# Altium PCB PCP-Support-STM32F407-version-2layers-only-test-EMI.PcbDoc (part 3 of 3)
Units mm, origin at the board's own origin, x right, y up, seen from the top; angles counter-clockwise.
Board outline 200 x 110 mm, 2 copper layers (Top Layer, Bottom Layer), stack 1.569 mm thick; 103 components, 128 nets, 450 pads, 633 vias.
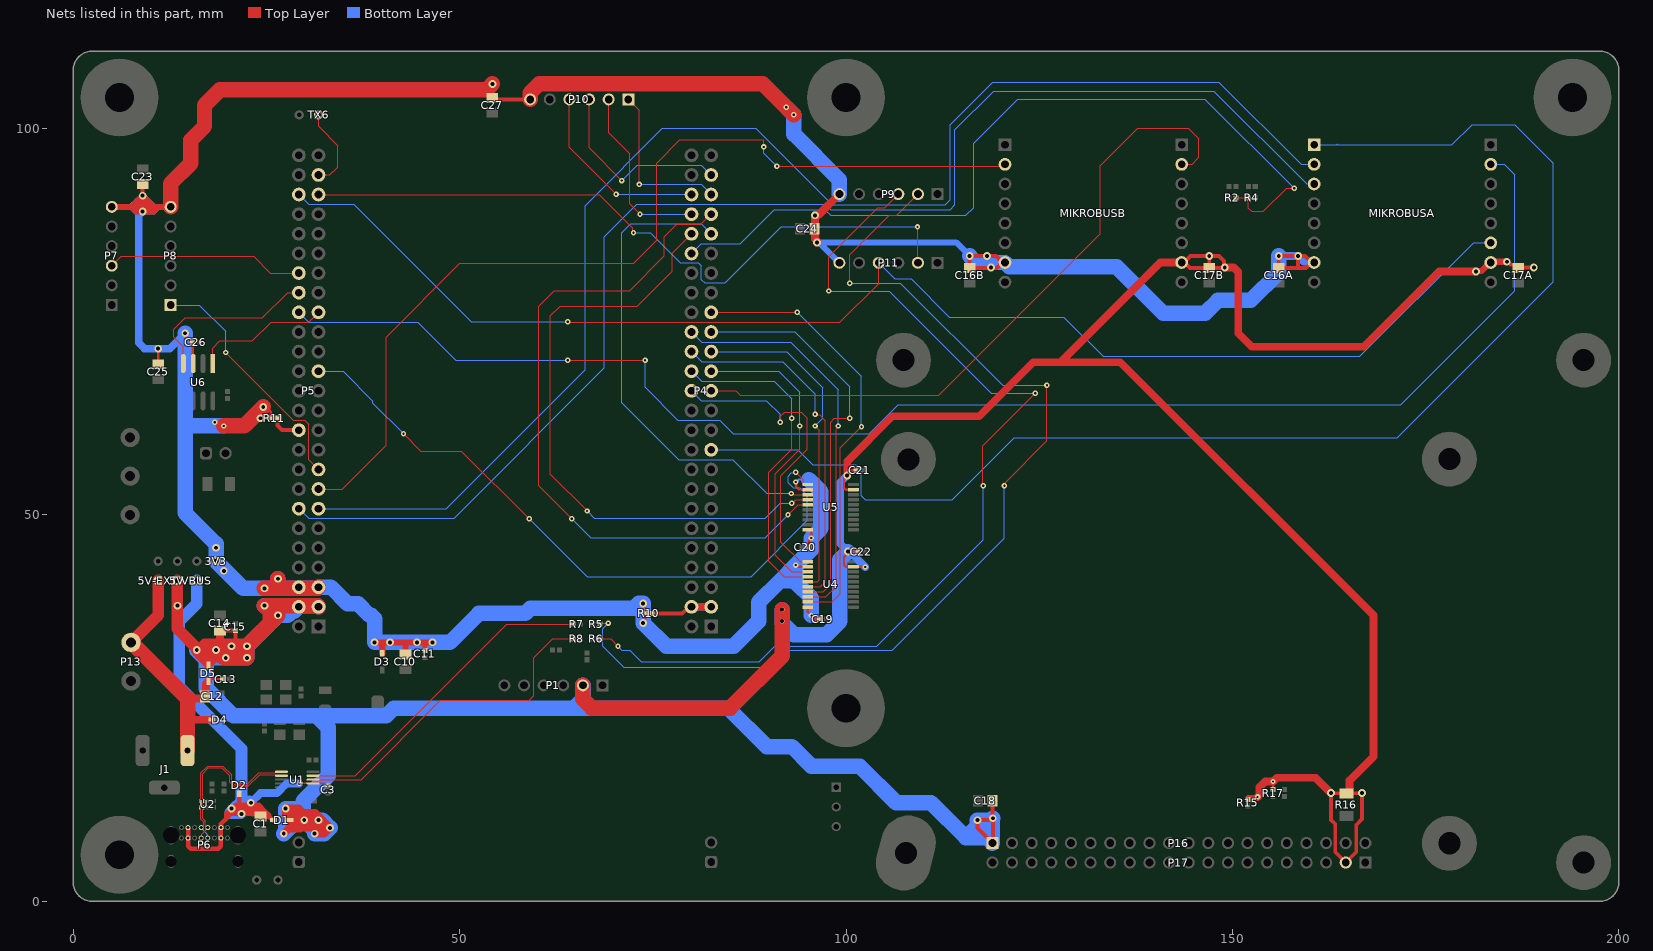
[diagram p2: the nets of this part, all layers, seen from the top]

## Via types
v1: diameter 0.7, hole 0.3, Top Layer to Bottom Layer, tented both sides, 539 vias
v2: diameter 1, hole 0.5, Top Layer to Bottom Layer, tented both sides, 92 vias
v3: diameter 0.6, hole 0.52, Top Layer to Bottom Layer, tented both sides, 2 vias

## Nets (pads, with @x,y where several pads share a name; then routed paths per layer and width w, separated by ;. In a path a pad name is that pad's centre, name@x,y a point inside that pad or via, vN(x,y) a via of type N, cw(c..) or ccw(c..) an arc to the next point about the centre after c; other vN are vias at no path point) (continued)
PC5/ADC12-IN15: MIKROBUSA.1 P4.19 | length 174.8
  Bottom Layer w0.15: P4.19@82.55,58.42 93.761,58.42 95.715,56.465 101.285,56.465 102,55.75 102,52.481 102.5,51.981 113.731,51.981 121.75,60 171.321,60 191.5,80.179 191.5,95.5 186.5,100.5 181,100.5 178.39,97.89 163.61,97.89 ; MIKROBUSA.1@160.57,97.89 163.61,97.89 ; 163.5,98 163.61,97.89
PC6/UART6-TX/TIM-3: P5.47 TX6.1 | length 11.2
  Top Layer w0.15: P5.47@31.75,93.98 33.23,93.98 34.25,95 34.25,97.75 31.75,100.25 TX6.1@31.75,102.193
PC8/D3: P5.45 P11.2 | length 91.3
  Top Layer w0.15: P5.45@31.75,91.44 68.06,91.44 72.425,87.075 72.425,86.575 v1(72.5,86.5) ; v1(109.25,87.25) 109.28,87.22 109.28,82.64 P11.2@109.31,82.61
  Bottom Layer w0.15: v1(72.5,86.5) 74.649,86.5 78.55,82.599 80.901,82.599 81.273,82.227 81.273,80.437 81.71,80 84.359,80 91.648,87.289 109.211,87.289 v1(109.25,87.25)
PC9/I2C3-SDA: MIKROBUSA.11 P5.46 P11.4 | length 176.9
  Top Layer w0.15: v1(64,75) 64.081,74.919 99.218,74.919 104.23,79.931 P11.4@104.23,82.61
  Bottom Layer w0.15: P5.46@29.21,91.44 30.468,90.182 36.318,90.182 51.5,75 v1(64,75) ; P11.4@104.23,82.61 106.305,80.535 108.421,80.535 113.381,75.575 128.188,75.575 133.263,70.5 166.5,70.5 181.19,85.19 MIKROBUSA.11@183.43,85.19
PC11/D2: P5.38 P7.3 | length 25.6
  Top Layer w0.15: P7.3@5,82.23 6.215,83.445 23.358,83.445 25.523,81.28 P5.38@29.21,81.28
PD0/CAN-RX: P5.36 U6.4 | length 23.1
  Top Layer w0.15: U6.4@14.265,69.58 14.265,71.735 13,73 13,74 14.5,75.5 24.5,75.5 27.74,78.74 P5.36@29.21,78.74
PD1/CAN-TX: P5.33 U6.1 | length 17.6
  Top Layer w0.15: U6.1@18.075,69.58 18.075,71.575 19,72.5 23.208,72.5 25.615,74.906 30.456,74.906 P5.33@31.75,76.2
PD2/INT: MIKROBUSA.15 P5.34 | length 192.1
  Top Layer w0.15: v1(64,70) v1(74,70)
  Bottom Layer w0.15: P5.34@29.21,76.2 30.515,74.895 44.605,74.895 49.5,70 v1(64,70) ; v1(74,70) 74,66.5 78.24,62.26 83.666,62.26 85.426,60.5 102.997,60.5 106.747,64.25 171.75,64.25 186.5,79 186.5,94 185.15,95.35 MIKROBUSA.15@183.43,95.35
PD7/A0: P5.27 U5.1 | length 88.3
  Top Layer w0.15: v1(42.75,60.5) 45,58.25 50.25,58.25 v1(59,49.5) ; v1(93.5,55.5) 94.474,54.526 94.474,54.075 94.624,53.925 U5.1@95.05,53.925
  Bottom Layer w0.15: P5.27@31.75,68.58 34.92,68.58 38.782,64.718 38.782,64.468 v1(42.75,60.5) ; v1(59,49.5) 66.494,42.006 87.732,42.006 95,49.273 95,52.5 94,53.5 93.151,53.5 92.5,54.151 92.5,55 92.925,55.425 93.425,55.425 v1(93.5,55.5)
PD8/UART3-TX: P4.40 R2.2 R4.2 | length 106.9
  Top Layer w0.15: R2.2@150.45,91 R4.2@152.05,91 ; R4.2@152.1,91 R4.2@152.05,91 ; v1(158,92.25) 157,92.25 154,89.25 152.5,89.25 152.05,89.7 R4.2@152.05,91
  Bottom Layer w0.15: P4.40@80.01,83.82 81.286,85.096 86.346,85.096 87.75,86.5 90.746,89.496 97.254,89.496 98,88.75 115.5,88.75 116.5,89.75 116.5,98.053 122.25,103.803 146.447,103.803 v1(158,92.25)
PD9/A1: P4.41 U5.3 | length 63.5
  Top Layer w0.15: v1(92.905,52.767) 93.054,52.767 93.196,52.625 U5.3@95.05,52.625
  Bottom Layer w0.15: P4.41@82.55,86.36 81.277,87.633 72.133,87.633 71,86.5 71,64.5 78.346,57.154 85.346,57.154 89.733,52.767 v1(92.905,52.767)
PD10/A2: P4.42 U5.4 | length 81.2
  Top Layer w0.15: v1(66.5,50.5) 61.75,55.25 61.75,75.75 63,77 73,77 77.5,81.5 77.5,83.85 P4.42@80.01,86.36 ; v1(93,51.5) 93.475,51.975 U5.4@95.05,51.975
  Bottom Layer w0.15: v1(66.5,50.5) 67.455,49.545 89.545,49.545 91.5,51.5 v1(93,51.5)
PD11/A3: P4.43 U5.5 | length 91.3
  Top Layer w0.15: v1(64.5,49.5) 60.25,53.75 60.25,77 62.25,79 72,79 76.5,83.5 76.5,86 78.076,87.576 81.226,87.576 P4.43@82.55,88.9 ; v1(92.5,50) 93.825,51.325 U5.5@95.05,51.325
  Bottom Layer w0.15: v1(64.5,49.5) 66.969,47.031 89.531,47.031 v1(92.5,50)
PD12: P4.44 P10.2 | length 23.2
  Top Layer w0.15: P10.2@69.29,103.75 69.29,99.46 72,96.75 72,90.25 v1(73.35,88.9)
  Bottom Layer w0.15: v1(73.35,88.9) P4.44@80.01,88.9
PD13: P4.45 P10.1 | length 21.4
  Top Layer w0.15: P10.1@71.83,103.75 73.25,102.33 v1(73.25,92.75)
  Bottom Layer w0.15: v1(73.25,92.75) 81.24,92.75 P4.45@82.55,91.44
PD14: P4.46 P10.4 | length 24.5
  Top Layer w0.15: P10.4@64.21,103.75 64.21,97.54 v1(70.25,91.5)
  Bottom Layer w0.15: v1(70.25,91.5) 70.28,91.47 79.98,91.47 P4.46@80.01,91.44
PD15: P4.47 P10.3 | length 25.2
  Top Layer w0.15: P10.3@66.75,103.75 66.75,97.5 v1(71,93.25)
  Bottom Layer w0.15: v1(71,93.25) 73,95.25 81.28,95.25 P4.47@82.55,93.98
PE0/CS_B: P5.17 P8.1 | length 32.3
  Top Layer w0.15: v1(19.75,71) 28.5,62.25 30,62.25 30.5,61.75 30.5,59.144 30.5,57.13 P5.17@31.75,55.88
  Bottom Layer w0.15: P8.1@12.62,77.15 16.35,77.15 19.75,73.75 v1(19.75,71)
PE2/RST: MIKROBUSB.2 P5.15 | length 124
  Top Layer w0.15: P5.15@31.75,53.34 34.84,53.34 40.5,59 40.5,73 50.055,82.555 72.555,82.555 75.5,85.5 75.5,95.5 78.5,98.5 89.275,98.5 89.362,98.412 v1(89.362,97.605) ; v1(91.065,95.113) 120.333,95.113 MIKROBUSB.2@120.57,95.35
  Bottom Layer w0.15: v1(89.362,97.605) 89.362,96.816 v1(91.065,95.113)
PE4/RST: MIKROBUSA.2 P5.13 | length 182.5
  Bottom Layer w0.15: P5.13@31.75,50.8 48.3,50.8 66.25,68.75 66.25,90 76.25,100 88.318,100 98.226,90.092 112.823,90.092 113.5,90.769 113.5,100.5 119,106 148.221,106 158.871,95.35 MIKROBUSA.2@160.57,95.35
PE5/CS: MIKROBUSA.3 P5.14 | length 176
  Bottom Layer w0.15: P5.14@29.21,50.8 30.465,49.545 49.295,49.545 68.75,69 68.75,86 72.92,90.17 97.328,90.17 97.998,89.5 113.5,89.5 114.09,90.09 114.09,99.806 119.103,104.819 147.586,104.819 159.595,92.81 MIKROBUSA.3@160.57,92.81
PE7/INT: MIKROBUSB.15 P4.25 | length 88.3
  Top Layer w0.15: P4.25@82.55,66.04 85.765,66.04 86.305,65.5 112,65.5 132.894,86.394 132.894,95.144 137.75,100 144.271,100 145.639,98.632 145.639,96.249 144.783,95.393 143.473,95.393 MIKROBUSB.15@143.43,95.35
  Bottom Layer w0.15: P4.25@82.55,66.04 P4.25@82.59,66
PE8/D0: P4.26 U4.1 | length 40.5
  Top Layer w0.15: v1(91.5,62) 91.5,62.743 92.05,63.293 94.207,63.293 95,62.5 95,58.5 91.587,55.087 91.587,46.461 94.123,43.925 U4.1@95.05,43.925
  Bottom Layer w0.15: P4.26@80.01,66.04 81.263,64.787 89.713,64.787 91.5,63 v1(91.5,62)
PE9/D1: P4.27 U4.3 | length 40.1
  Top Layer w0.15: v1(94,61.5) 94,58.5 90.835,55.335 90.835,44.766 92.975,42.625 U4.3@95.05,42.625
  Bottom Layer w0.15: P4.27@82.55,68.58 91.285,68.58 94,65.865 v1(94,61.5)
PE10/D2: P4.28 U4.4 | length 42.6
  Top Layer w0.15: v1(93,62.5) 93,58.5 90,55.5 90,44 92,42 95.025,42 U4.4@95.05,41.975
  Bottom Layer w0.15: P4.28@80.01,68.58 81.332,67.258 90.737,67.258 93,64.994 v1(93,62.5)
PE11/D3: P4.29 U4.5 | length 43.5
  Top Layer w0.15: U4.5@95.05,41.325 96.325,41.325 96.57,41.57 96.57,60.93 v1(96,61.5)
  Bottom Layer w0.15: P4.29@82.55,71.12 92.337,71.12 97,66.457 97,62.5 v1(96,61.5)
PE12/D4: P4.30 U4.6 | length 45.9
  Top Layer w0.15: U4.6@95.05,40.675 96.675,40.675 97.303,41.303 97.303,62.197 96.575,62.925 96.075,62.925 v1(96,63)
  Bottom Layer w0.15: P4.30@80.01,71.12 81.309,69.821 91.799,69.821 96,65.62 v1(96,63)
PE13/D5: P4.31 U4.7 | length 52
  Top Layer w0.15: U4.7@95.05,40.025 97.025,40.025 98,41 98,62 98.5,62.5 v1(100.5,62.5)
  Bottom Layer w0.15: P4.31@82.55,73.66 93.389,73.66 100.5,66.549 v1(100.5,62.5)
PE14/D6: P4.32 U4.8 | length 51.9
  Top Layer w0.15: U4.8@95.05,39.375 97.375,39.375 98.723,40.723 98.723,61.137 99,61.414 v1(99,61.5)
  Bottom Layer w0.15: P4.32@80.01,73.66 81.335,72.335 92.84,72.335 99,66.175 v1(99,61.5)
PE15/D7: P4.33 U4.9 | length 56.8
  Top Layer w0.15: P4.33@82.55,76.2 v1(93.7,76.2) ; U4.9@95.05,38.725 98.201,38.725 99.27,39.794 99.27,58.682 v1(102,61.412)
  Bottom Layer w0.15: v1(93.7,76.2) 102,67.9 v1(102,61.412)
PMOD-RX: P9.3 R6.1 | length 128.2
  Top Layer w0.15: R6.1@68.16,33.96 69.54,33.96 v1(70.5,33) ; v1(97.75,78.96) 97.75,83.418 104.082,89.75 105.02,89.75 P9.3@106.77,91.5 ; v1(117.75,53.75) 117.698,53.802 117.698,58.948 v1(124.5,65.75)
  Bottom Layer w0.15: v1(70.5,33) 71,32.5 72,32.5 73.5,31 88.75,31 90.75,33 104,33 117.75,46.75 v1(117.75,53.75) ; v1(97.75,78.96) 105.603,78.96 118.813,65.75 v1(124.5,65.75)
PMOD-TX: P9.2 R5.1 | length 133.3
  Top Layer w0.15: R5.1@68.16,35.865 68.295,36 v1(69.25,36) ; v1(100.5,79.96) 100.5,83.679 105.571,88.75 106.56,88.75 P9.2@109.31,91.5 ; v1(120.5,53.75) 120.592,53.842 120.592,54.171 126,59.58 v1(126,66.75)
  Bottom Layer w0.15: v1(69.25,36) 68.5,35.25 68.5,33 71.25,30.25 90.5,30.25 92.75,32.5 106,32.5 120.5,47 v1(120.5,53.75) ; v1(100.5,79.96) 107.04,79.96 120.25,66.75 v1(126,66.75)
USB-UART-RX: R7.1 U1.9 | length 41.8
  Top Layer w0.15: U1.9@31.05,16.25 36.493,16.25 56.108,35.865 R7.1@64.72,35.865
USB-UART-TX: R8.1 U1.8 | length 44.1
  Top Layer w0.15: U1.8@31.05,15.75 37.25,15.75 47.5,26 59,26 59.598,26.598 59.598,31.485 62.073,33.96 R8.1@64.72,33.96
USB_D_N: P6.A7 P6.B7 U1.2 U2.2 U2.9 | length 21.8
  Top Layer w0.125: P6.B7@16.575,8.175 16.675,8.275 16.675,8.675 17.425,9.425 P6.A7@17.425,9.525 17.425,9.546 17.125,9.846 17.125,10.375 16.979,10.521 16.78,10.72 16.78,11.854 16.853,11.928 16.868,11.928 16.905,11.965 U2.2@16.905,12.148 16.905,12.33 16.868,12.368 16.853,12.368 16.78,12.441 16.78,12.689 16.853,12.763 16.868,12.763 16.905,12.8 U2.9@16.905,12.983 16.905,13.165 16.868,13.203 16.853,13.203 16.78,13.276 16.78,16.53 17.5,17.25 19.25,17.25 20.244,16.256 20.244,15.402 20.777,14.869 22.619,14.869 24.124,16.374 26.089,16.374 26.212,16.25 U1.2@26.95,16.25
USB_D_P: P6.A6 P6.B6 U1.1 U2.1 U2.10 | length 22.3
  Top Layer w0.125: P6.A6@16.575,9.525 16.575,9.546 16.875,9.846 16.875,10.271 16.53,10.616 16.53,11.854 16.457,11.928 16.442,11.928 16.405,11.965 U2.1@16.405,12.148 16.405,12.33 16.442,12.368 16.457,12.368 16.53,12.441 16.53,12.689 16.457,12.763 16.442,12.763 16.405,12.8 U2.10@16.405,12.983 16.405,13.165 16.442,13.203 16.457,13.203 16.53,13.276 16.53,16.634 17.396,17.5 19.354,17.5 20.494,16.359 20.494,15.506 20.881,15.119 22.516,15.119 23.947,16.55 24.02,16.624 26.089,16.624 26.216,16.75 U1.1@26.95,16.75
  Bottom Layer w0.125: P6.A6@16.575,9.525 16.575,9.425 17.325,8.675 17.325,8.275 P6.B6@17.425,8.175
V5V_EXT: 5V-EXT.1 C12.2 C13.2 D4.2 D5.2 J1.1 P13.2 | length 36.1
  Top Layer w0.3: D5.2@17.5,28.43 17.5,28.59 17.66,28.75 C13.2@19.3,28.75
  Top Layer w1: 14.8,23.5 D4.2@17.93,23.5 ; 14.849,26.25 16.9,26.25 17.05,26.4 C12.2@17.05,26.5 17.2,26.65 17.2,28.13 D5.2@17.5,28.43
  Top Layer w1.5: P13.2@7.5,33.5 11,37 5V-EXT.1@11,41.5
  Top Layer w2: P13.2@7.596,33.404 14.849,26.151 ; J1.1@14.8,19.5 14.8,23.5 ; 14.849,23.5 14.849,26.25
VBUS: C1.2 C3.2 D1.2 D2.2 P6.A4 P6.A9 P6.B4 P6.B9 U1.7 VBUS.1 | length 103.3
  Top Layer w0.2: v1(29.25,15.25) U1.7@31.05,15.25 32.65,15.25 C3.2@33,14.9
  Top Layer w0.6: P6.A4@14.875,9.525 P6.B9@14.875,8.175 14.885,8.165 14.885,7.139 15.236,6.788 18.774,6.788 19.125,7.139 P6.B4@19.125,8.175 P6.A9@19.125,9.525 19.135,9.535 19.135,10.019 19.817,10.702 ; v2@20.577,11.923 v2@20.683,11.923 ; 21.468,12.077 22.5,12.077 ; D2.2@21.5,13.93 21.5,12.5 ; D1.2@25.93,10.5 25.83,10.5 25.376,10.954 ; 19.817,10.702 20.433,11.317 ; 19.817,10.702 19.817,11.317 ; 19.817,11.317 20.433,11.317 ; 19.817,11.317 v2(20.5,12) v2@20.606,12 ; 20.433,11.317 v2@21.289,11.317 ; v2@20.606,12 20.608,12 21.108,12.5 21.5,12.5 ; v2@20.606,12 v2@20.683,11.923 ; v2@20.683,11.923 v2@21.289,11.317 ; v2@20.683,11.923 21.468,11.923 v2@21.93,11.462 ; v2@21.289,11.317 v2(21.786,11.317) ; 21.5,12.5 23.55,12.5 ; v2(21.786,11.317) 23.186,11.317 23.203,11.3 23.9,11.3 C1.2@24.25,10.95 24.254,10.954 25.376,10.954 ; v2(21.786,11.317) v2@21.93,11.462 ; v2@21.93,11.462 22.215,11.747 ; 22.215,11.747 24.753,11.747 ; 22.215,11.747 22.5,12.032 22.5,12.077 ; 22.5,12.077 23.7,12.077 ; 23.55,12.5 24.05,12.5 24.05,12.427 ; 23.55,12.5 23.55,12.227 23.7,12.077 ; 23.7,12.077 24.05,12.427 ; 24.05,12.427 24.073,12.427 24.753,11.747 ; 24.753,11.747 25.376,11.124 25.376,10.954
  Bottom Layer w0.6: P6.B4@19.125,8.175 P6.A9@19.125,9.525 P6.A9@19.135,9.535 ; 20.317,11.317 v2(21.786,11.317) ; 20.327,11.423 20,11.75 20.142,11.75 20.392,12 v2(20.5,12) ; 20.423,11.423 20.423,11.588 20.423,11.923 v2(20.5,12) ; 21.786,12.95 21.46,12.95 v2@20.544,12.034 ; v2(23,12.75) 22.502,12.75 21.786,12.034 ; v2(20.5,12) 20.534,12.034 v2@20.544,12.034 ; v2(20.5,12) v2@20.51,12 ; v2(20.5,12) v2@20.608,12 ; v2@20.51,12 v2@20.608,12 ; v2@20.51,12 v2@20.544,12.034 ; v2@20.544,12.034 20.869,12.034 21.786,12.034 ; v2@20.608,12 20.722,11.886 21.185,11.423 21.214,11.394 21.709,11.394 v2@21.75,11.353 ; v2@20.608,12 20.836,12 21.434,12 ; 21.434,12 21.75,11.684 21.75,11.5 v2@21.75,11.461 ; 21.434,12 21.434,11.777 21.731,11.481 v2@21.75,11.461 ; v2@21.75,11.353 v2@21.75,11.461 ; v2@21.75,11.353 v2(21.786,11.317) ; v2@21.75,11.461 v2@21.786,11.426 ; v2(21.786,11.317) v2@21.786,11.426 ; v2(21.786,11.317) 22.502,12.034 22.284,12.034 21.786,12.034 ; v2@21.786,11.426 21.786,11.536 21.786,12.034
  Bottom Layer w1: v2(23,12.75) 24.25,14 26.376,14 27.626,15.25 v1(29.25,15.25)
  Bottom Layer w1.5: VBUS.1@16,41.5 16,38.5 13.737,36.237 13.737,27.763 21.786,19.714 21.786,12.95 ; 21.786,12.034 21.786,12.95 ; 21.786,12.95 20.869,12.034 20.836,12 20.722,11.886 20.423,11.588 20.327,11.491 20.327,11.423 20.423,11.423 21.185,11.423 21.673,11.423 21.731,11.481 21.75,11.5 21.786,11.536 22.284,12.034 v2(23,12.75) 22.8,12.95 21.786,12.95
VCC_3V3: 3V3.1 C10.2 C11.2 C16A.2 C16B.2 C19.2 C20.2 C23.2 C24.2 C25.2 C26.2 C27.2 D3.1 MIKROBUSA.7 MIKROBUSB.7 P5.5 P5.6 P7.6 P8.6 P9.6 P10.6 P11.6 R10.1 R11.1 U4.2 U4.10 U5.2 U5.10 U6.3 | length 489.7
  Top Layer w0.3: C25.2@11,69.45 v2(11,71.5) ; v2(14.5,73.5) 14.5,73.25 C26.2@15.44,72.31 15.487,72.263 15.487,69.627 U6.3@15.535,69.58 ; v2(24.25,62.5) 25.449,62.5 25.574,62.625 25.574,63.379 25.362,63.591 25.159,63.591 24.79,63.961 v2(24.6,63.961) ; v2(73.75,36) 73.75,36.189 74.05,36.489 R10.1@74.05,37.25 ; v2(73.751,38.544) 73.751,38.355 74.051,38.055 R10.1@74.051,37.294 ; v1(93.5,43.5) 93.725,43.275 U4.2@95.05,43.275 ; v1(93.5,54.25) 93.577,54.173 93.577,53.598 93.9,53.275 U5.2@95.05,53.275 ; U4.10@95.05,38.075 95.05,37.45 v1(95.525,36.975) 96,36.5 C19.2@96.55,36.5 ; U5.10@95.05,48.075 95.425,48.075 95.5,48 v1(95.5,47) 95.5,46.892 95.177,46.569 C20.2@95.177,45.79
  Top Layer w0.5: v2(9,91.3) C23.2@9,92.8 ; v2(54.25,105.75) C27.2@54.25,103.95 C27.2@54.45,103.75 ; C27.2@54.35,103.75 C27.2@54.45,103.75 ; P10.6@59.13,103.75 C27.2@54.45,103.75 ; MIKROBUSB.7@120.57,82.65 MIKROBUSB.7@120.259,82.65 ; MIKROBUSA.7@160.57,82.65 MIKROBUSA.7@160.259,82.65 ; MIKROBUSB.7@120.259,82.65 119.409,83.5 v2(118.25,83.5) v2(116,83.5) C16B.2@116,81.95 119.504,81.95 120.204,82.65 MIKROBUSB.7@120.259,82.65 ; 158.5,81.95 v2(158.5,83.5) ; 158.5,81.95 C16A.2@156,81.95 v2(156,83.5) v2(158.5,83.5) ; 158.5,81.95 159.504,81.95 160.204,82.65 MIKROBUSA.7@160.259,82.65 ; v2(158.5,83.5) 159.409,83.5 MIKROBUSA.7@160.259,82.65
  Top Layer w0.6: C11.2@45.5,32.45 45.5,33.5
  Top Layer w0.8: P7.6@5,89.85 7.55,89.85 ; P8.6@12.62,89.85 11,89.85 ; v2(39,33.5) 40,33.5 ; D3.1@40,32.07 40,33.5 ; C10.2@43,31.95 43,33.5 ; v2(46.5,33.5) 45.5,33.5 v2(44.5,33.5) 43,33.5 ; 7.55,89.85 7.912,90.213 ; 7.55,89.85 8.112,89.288 v2@8.908,89.288 ; 7.912,90.213 8.275,90.575 ; 7.912,90.213 7.983,90.213 ; 7.983,90.213 9,90.213 ; 7.983,90.213 v2@8.908,89.288 ; 8.275,90.575 9,90.575 ; 8.275,90.575 v2(9,91.3) ; v2@8.908,89.288 8.946,89.25 v2(9,89.25) ; v2@8.908,89.288 8.962,89.288 v2(9,89.25) ; v2(9,89.25) v2@9.025,89.275 ; v2(9,89.25) 9,90.213 ; 9,90.213 9.237,90.213 9.6,89.85 ; 9,90.213 9,90.575 ; 9,90.575 9.575,90.575 9.65,90.65 ; 9,90.575 v2(9,91.3) ; v2(9,91.3) 9.65,90.65 ; v2@9.025,89.275 9.6,89.85 ; v2@9.025,89.275 10.425,89.275 11,89.85 ; 9.6,89.85 10.45,89.85 ; 9.65,90.65 10.45,89.85 ; 10.45,89.85 11,89.85 ; 40,33.5 v2(41,33.5) 43,33.5
  Top Layer w1: v2(96.25,85.25) 96.25,85.439 96,85.689 96,86.95 C24.2@95.95,87 96,87.05 v2(96,88.75) 96.038,88.788 96.438,88.788 P9.6@99.15,91.5
  Top Layer w2: P8.6@12.62,89.85 12.62,92.86 15.25,95.49 15.25,98.5 17,100.25 17,103 19,105 53.5,105 v2(54.25,105.75) ; v1(19.5,61.5) 22.14,61.5 v2(24.6,63.961) ; v2(24.75,40.49) 26.5,40.49 ; v2(26.5,41.74) 26.5,40.49 ; P5.5@31.75,40.64 31.6,40.49 26.5,40.49 ; P10.6@59.13,103.75 59.13,104.578 60.302,105.75 89.25,105.75 v1(93.25,101.75)
  Bottom Layer w0.3: v1(93.5,54.25) 93.557,54.25 93.876,54.568 95.182,54.568
  Bottom Layer w0.8: P7.6@5,89.85 7.55,89.85 ; P8.6@12.62,89.85 11,89.85 ; 3V3.1@18.5,44 18.5,43.892 19.462,42.93 19.462,42.788 v2(19.5,42.75) ; P11.6@99.15,82.61 96.548,85.212 96.288,85.212 v2(96.25,85.25) 114.25,85.25 v2(116,83.5) ; 7.55,89.85 8.275,90.575 ; 7.55,89.85 9,89.85 ; 7.55,89.85 8.112,89.288 8.962,89.288 v2(9,89.25) ; 8.275,90.575 9,90.575 ; 8.275,90.575 v2(9,91.3) ; v2(9,89.25) 9.038,89.288 10.438,89.288 11,89.85 ; v2(9,89.25) 9,89.85 ; 9,89.85 10.45,89.85 ; 9,89.85 9,90.575 ; 9,90.575 9.325,90.575 9.525,90.775 ; 9,90.575 v2(9,91.3) ; v2(9,91.3) 9.525,90.775 ; 9.525,90.775 10.45,89.85 ; 10.45,89.85 11,89.85
  Bottom Layer w1: v2(9,89.25) 8.5,88.75 8.5,72.25 9.25,71.5 v2(11,71.5) 12.5,71.5 v2(14.5,73.5) ; v2(156,83.5) v2(158.5,83.5) 159.225,82.775 160.445,82.775 MIKROBUSA.7@160.57,82.65
  Bottom Layer w2: v2(14.5,73.5) 14.5,61.875 ; v1(19.5,61.5) 14.875,61.5 14.5,61.875 ; v2(26.5,41.74) 26.5,40.74 26.75,40.49 ; 92.5,102.5 v1(93.25,101.75) 93.25,99.25 99.15,93.35 P9.6@99.15,91.5 ; 95.182,54.568 96.75,53 96.75,48.25 v1(95.5,47) 95.5,45.5 v1(93.5,43.5) ; v1(95.525,36.975) 95.525,39.225 93.5,41.25 ; v2(116,83.5) 116.85,82.65 MIKROBUSB.7@120.57,82.65 121.134,82.086 135.036,82.086 141.021,76.1 146.479,76.1 148.118,77.739 152.361,77.739 156,81.379 v2(156,83.5) ; 14.5,61.875 14.5,50.25 18.5,46.25 v2(18.5,45.75) 3V3.1@18.5,44 22.01,40.49 v2(24.75,40.49) 26.75,40.49 ; 26.75,40.49 31.6,40.49 P5.5@31.75,40.64 33.36,40.64 35.5,38.5 36.875,38.5 38.375,37 38.578,37 39,36.578 v2(39,33.5) v2(41,33.5) v2(44.5,33.5) v2(46.5,33.5) 48.75,33.5 52.5,37.25 58.5,37.25 59.147,37.897 72.518,37.897 73.165,38.544 v2(73.751,38.544) 73.751,36.001 76.75,33 85.461,33 88.708,36.246 88.708,38.708 91.5,41.5 ; 91.5,41.5 v1(93.5,43.5) ; 91.5,41.5 93.121,41.5 93.371,41.25 93.5,41.25 ; 93.5,41.25 v1(93.5,43.5)
  other v1: 18.316,61.977 92.25,102.75
  other v2: 118.75,82
VCC_5V: 5V.1 C14.2 C15.2 C17A.2 C17B.2 C18.2 C21.2 C22.2 D1.1 D5.1 MIKROBUSA.10 MIKROBUSB.10 P1.2 P5.3 P5.4 P16.1 P17.2 R15.2 R16.1 R17.2 U4.19 U5.19 | length 627.6
  Top Layer w0.3: U5.19@100.95,53.275 100.925,53.25 100,53.25 99.75,53.5 99.75,54.7 v2(100.15,55.1) 100.8,55.75 C21.2@101.3,55.75 ; C22.2@101.55,45.25 v2(100.25,45.25) 100.25,45.061 99.75,44.561 99.75,43.5 99.975,43.275 U4.19@100.95,43.275 102.475,43.275 v1(102.5,43.25) ; R17.2@155.25,14.45 v1(155.25,15.5)
  Top Layer w0.5: C18.2@118.95,13 118.975,12.975 118.975,10.775 v2(119,10.75) ; MIKROBUSB.10@143.43,82.65 MIKROBUSB.10@143.741,82.65 ; R15.2@152,13.5 v1(153.25,13.5) ; R16.1@164.725,13.975 162.775,13.975 v2(162.75,14) 162.75,10.537 163.306,9.981 163.306,6.364 P17.2@164.661,5.009 166.016,6.364 166.016,9.892 166.75,10.626 v2(166.75,14) 166.725,13.975 165.025,13.975 164.775,13.975 R16.1@164.75,13.95 ; MIKROBUSA.10@183.311,82.65 MIKROBUSA.10@183.43,82.65 ; v2(185.5,82.75) 185.635,82.75 186.035,82.35 186.6,82.35 C17A.2@187,81.95 187.05,82 v2(189,82) ; v2(119,10.75) 119,7.598 P16.1@118.941,7.539 117,9.479 v2(117,10.5) 118.615,10.5 118.865,10.75 v2(119,10.75) ; MIKROBUSB.10@143.741,82.65 144.591,83.5 v2(147,83.5) ; MIKROBUSB.10@143.741,82.65 143.796,82.65 144.496,81.95 C17B.2@147,81.95 ; C17B.2@147,81.95 v2(147,83.5) ; C17B.2@147,81.95 148.95,81.95 v2(149,82) 148.904,82.096 148.904,82.846 148.25,83.5 v2(147,83.5)
  Top Layer w0.56: C14.2@19,35.05 C15.2@21,35.05 ; 21,33.5 C15.2@21,35.005
  Top Layer w0.8: v2(181.5,81.5) 181.538,81.538 182.199,81.538 MIKROBUSA.10@183.311,82.65 ; MIKROBUSA.10@183.43,82.65 183.53,82.75 v2(185.5,82.75)
  Top Layer w1: 17,33 18.5,33 ; 18.5,31.57 D5.1@17.5,30.57 ; 18.5,33.5 17,33.5 v2(16,32.5) ; C14.2@19,35 19,33.5 ; v2(20.5,33) 19,33 ; v2@20.75,33.25 20.5,33.5 19,33.5 ; 21,33 v2(22.5,31.5) ; v2(27.25,8.75) 28,9.5 28.14,9.5 ; 29.381,9.375 28.265,9.375 28.195,9.445 ; 29.381,9.5 28.25,9.5 ; v2(100.15,55.1) 100.15,56.9 106,62.75 117.25,62.75 124.25,69.75 127.75,69.75 ; MIKROBUSB.10@143.43,82.65 140.65,82.65 127.75,69.75 ; v2(149,82) 150.164,82 150.75,81.414 150.75,73.5 152.5,71.75 167,71.75 176.75,81.5 v2(181.5,81.5) ; v1(153.25,13.5) 153.5,13.75 153.5,14.75 154.25,15.5 v1(155.25,15.5) 155.75,16 160.75,16 v2(162.75,14) ; R16.1@164.725,13.975 R16.1@164.775,13.975 ; R16.1@165.025,13.975 165.15,14.1 165.15,15.62 168.25,18.72 168.25,37 135.5,69.75 127.75,69.75 ; v2(16,32.5) 17.25,32.5 ; v2(16,32.5) 16,32.07 16.41,31.66 ; 16.41,31.66 17.25,32.5 ; 16.41,31.66 D5.1@17.5,30.57 ; 17.25,32.5 v2(18.5,32.5) ; D5.1@17.5,30.57 17.5,31.5 v2(18.5,32.5) ; v2(18.5,32.5) 19,33 ; 19,33 19,33.5 ; v2(27.5,12) 28.07,11.43 ; v2(27.5,12) 29.18,12 29.75,11.43 ; v2(27.5,12) 27.5,11.07 D1.1@28.07,10.5 ; D1.1@28.07,10.5 28.07,9.57 28.14,9.5 ; D1.1@28.07,10.5 28.07,11.43 ; D1.1@28.07,10.5 29.25,10.5 ; 28.07,11.43 29.75,11.43 ; 28.14,9.5 28.25,9.5 ; 28.14,9.5 28.195,9.445 ; 28.195,9.445 28.25,9.5 ; 28.25,9.5 29.25,10.5 ; 29.25,10.5 v2(29.91,10.5) v2(31.75,10.5) ; 29.75,11.43 30.82,11.43 ; 30.82,11.43 31.32,11.43 v2(33.25,9.5) ; 30.82,11.43 v2(31.75,10.5) ; v2(31.25,8.75) 32.5,8.75 v2(33.25,9.5) ; v2(31.25,8.75) 32,9.5 ; v2(31.25,8.75) v2@31.25,9 ; v2@31.25,9 31.75,9.5 ; v2@31.25,9 31.25,9.5 ; 31.25,9.5 31.75,9.5 ; 31.25,9.5 29.756,9.5 29.381,9.875 31.125,9.875 31.25,10 ; 31.25,9.5 31.25,10 ; 31.25,10 v2(31.75,10.5) ; 31.75,9.5 32.25,10 ; 31.75,9.5 32,9.5 ; v2(31.75,10.5) 32.25,10 ; 32,9.5 v2@32.75,9.5 ; 32.25,10 v2@32.75,9.5 ; v2@32.75,9.5 v2(33.25,9.5)
  Top Layer w1.5: 5V.1@13.5,41.5 v2(13.5,38.25) 13.5,35.25 16,32.75 v2(16,32.5)
  Top Layer w2: 19,32 v2@19.43,31.57 ; v2(19.75,31.5) v2(22.5,31.5) v2(22.5,33) ; v2(20.5,33) 21,33 v2(22.5,33) ; P5.3@31.75,38.1 31.6,38.25 26.5,38.25 ; P1.2@65.96,27.94 65.96,26.172 67.132,25 85,25 91.75,31.75 v3(91.75,36.25) v3(91.75,37.75) ; v2(22.5,33) 25.5,36 ; 25.5,36 v2(26.5,37) 26.5,38.25 ; 25.5,36 25.5,37.5 v2(24.75,38.25) 26.5,38.25
  Bottom Layer w1: v2(100.15,55.1) 99.25,54.2 99.25,46.25 v2(100.25,45.25) 100.5,45.25 v1(102.5,43.25)
  Bottom Layer w2: v2(27.25,8.75) v2@27.5,9 ; P5.4@29.21,38.1 28.709,37.599 28.365,37.599 27.766,37 v2(26.5,37) ; P5.3@31.75,38.1 31.6,38.25 26.5,38.25 ; P1.2@65.96,27.94 66,27.9 66,26.172 64.828,25 ; v3(91.75,37.75) 91.75,36 93.25,34.5 97.512,34.5 99.218,36.206 99.218,44.218 v2(100.25,45.25) ; v2(119,10.75) v2@118.941,10.691 ; 17.25,31.5 17.25,27.5 20.75,24 31.5,24 ; 17.25,31.5 17.25,32.5 ; 17.25,31.5 v2(19.75,31.5) v2(22.5,31.5) v2(22.5,33) ; 17.25,31.5 17,31.5 v2(16,32.5) 17.25,32.5 ; 17.25,32.5 v2(18.5,32.5) 22,32.5 v2(22.5,33) ; v2(22.5,33) v2(26.5,37) ; v2(26.5,37) 26.5,38.25 ; v2(26.5,37) 26,37 v2(24.75,38.25) 26.5,38.25 ; v2@27.5,9 29,10.5 v2(29.91,10.5) ; v2@27.5,9 v2(27.5,12) 29,12 29.75,11.25 29.75,12.965 33,16.215 33,22.5 31.5,24 ; v2(29.91,10.5) v2(31.75,10.5) ; v2(29.91,10.5) 31.25,9.16 v2(31.25,8.75) ; v2(31.25,8.75) 31.75,9.25 v2(31.75,10.5) ; v2(31.25,8.75) 32.5,8.75 v2(33.25,9.5) 32.25,10.5 v2(31.75,10.5) ; 31.5,24 40.5,24 41.5,25 64.828,25 ; 64.828,25 84.75,25 89.75,20 93,20 95.5,17.5 101.75,17.5 106.5,12.75 111,12.75 115.5,8.25 ; 115.5,8.25 117.25,8.25 ; 115.5,8.25 117,9.75 v2(117,10.5) ; v2(117,10.5) 118.75,10.5 v2@118.941,10.691 ; v2(117,10.5) 117.25,10.25 117.25,8.25 ; 117.25,8.25 118.229,8.25 P16.1@118.941,7.539 v2@118.941,10.691
VDDA: P5.22 R11.2 | length 4
  Top Layer w0.5: R11.2@26.45,62.5 26.45,61.55 27.04,60.96 P5.22@29.21,60.96
VDDB: P4.3 P4.4 R10.2 | length 10.5
  Top Layer w0.5: R10.2@74.95,37.25 78.814,37.25 79.664,38.1 P4.4@80.01,38.1
  Top Layer w1: P4.4@80.01,38.1 P4.3@82.55,38.1
  Bottom Layer w1: P4.4@80.01,38.1 P4.3@82.55,38.1
pads on no net: J1.3 P1.1 P1.6 P4.48 P6.A8 P6.B8 U1.4 U6.5

## Polygon pours and split planes (outlines as drawn)
GND on Top Layer "GND_L01_P001" (solid, remove dead copper, pour order 1): 2.5,0 cw(c2.5,2.5) 0,2.5 0,107.5 cw(c2.5,107.5) 2.5,110 197.5,110 cw(c197.5,107.5) 200,107.5 200,2.5 cw(c197.5,2.5) 197.5,0
GND on Bottom Layer "GND_L02_P000" (solid, remove dead copper, pour order 0): 2.5,0 cw(c2.5,2.5) 0,2.5 0,107.5 cw(c2.5,107.5) 2.5,110 197.5,110 cw(c197.5,107.5) 200,107.5 200,2.5 cw(c197.5,2.5) 197.5,0

## Silkscreen, mask and mechanical layers (free items; w line width, h text height)
Top Overlay:
  drawing of 50 lines, arcs and shapes, not listed
  text ".NomDeProjet" at 19.25,107.318 h2.2
  text ".Revision" at 48.25,107.275 h2.5
  text "3V3" at 59.651,105.605 h1.3 r90
  text "GND" at 62.151,105.605 h1.3 r90
  text "PD14" at 64.666,105.605 h1.3 r90
  text "PD15" at 67.151,105.605 h1.3 r90
  text "PD12" at 69.666,105.605 h1.3 r90
  text "PD13" at 72.151,105.605 h1.3 r90
  text ".NomDeLetudiant" at 32.25,105.568 h2.2
  text ".Print_Date" at 21.998,105.463 h2
  text "Version: 2 couches -- Test EMI" at 119.505,105.284 h5
  text "GND" at 24.527,96.133 h2
  text "GND" at 33.694,96.137 h2
  text "GND" at 84.396,96.093 h2
  text "UART3 SELECT" at 147.75,96.013 h1.2
  text "GND" at 75.276,95.953 h2
  text "MB1" at 149,94.75 h1.2
  text "MB2" at 151.75,94.75 h1.2
  text "PC7" at 25.14,93.593 h2
  text "PC6" at 33.694,93.597 h2
  text "PD15" at 84.396,93.553 h2
  text "NC" at 76.478,93.413 h2
  text "3V3" at 99.651,93.355 h1.3 r90
  text "GND" at 102.151,93.355 h1.3 r90
  text "PB0" at 104.651,93.355 h1.3 r90
  text "PA3-RX" at 107.151,93.355 h1.3 r90
  text "PA2-TX" at 109.666,93.355 h1.3 r90
  text "PC4" at 112.151,93.355 h1.3 r90
  text "PD13" at 84.396,91.143 h2
  text "PC9" at 25.149,91.053 h2
  text "PC8" at 33.694,91.057 h2
  text "PD14" at 74.896,90.873 h2
  text "3V3" at 14.75,89.514 h1.3
  text "3V3" at 1.184,89.264 h1.3
  text "PD11" at 84.396,88.543 h2
  text "PA9" at 25.075,88.513 h2
  text "PA8" at 33.694,88.517 h2
  text "PD12" at 74.941,88.333 h2
  text "GND" at 14.75,87.014 h1.3
  text "GND" at 0.729,86.764 h1.3
  text "PA13" at 24.259,85.973 h2
  text "PA10" at 33.694,85.977 h2
  text "PD9" at 84.396,85.933 h2
  text "PD10" at 74.906,85.793 h2
  text "PA5" at 14.75,84.514 h1.3
  text "PA15" at 0.577,84.258 h1.3
  text "PA15" at 24.255,83.433 h2
  text "PA14" at 33.694,83.437 h2
  text "PB15" at 84.396,83.393 h2
  text "PD8" at 75.748,83.253 h2
  text "PA6" at 14.75,82.014 h1.3
  text "PC11" at 0.595,81.764 h1.3
  text "PB13" at 84.396,80.943 h2
  text "PC11" at 24.322,80.893 h2
  text "PC10" at 33.694,80.897 h2
  text "PB14" at 75.013,80.713 h2
  text "PA7" at 14.75,79.5 h1.3
  text "PB7" at 1.103,79.25 h1.3
  text "3V3" at 99.736,78.788 h1.3 r90
  text "PA8" at 107.236,78.699 h1.3 r90
  text "PC9" at 104.736,78.635 h1.3 r90
  text "PC8" at 109.736,78.635 h1.3 r90
  text "PD0" at 24.988,78.353 h2
  text "PC12" at 33.694,78.357 h2
  text "PB11" at 84.396,78.343 h2
  text "GND" at 102.236,78.295 h1.3 r90
  text "PB12" at 75.057,78.173 h2
  text "PB14" at 112.25,78.057 h1.3 r90
  text "PE0" at 14.75,77.014 h1.3
  text "PB5" at 1.097,76.764 h1.3
  text "PD2" at 25.023,75.813 h2
  text "PD1" at 33.694,75.817 h2
  text "PE15" at 84.396,75.773 h2
  text "PB10" at 75.022,75.633 h2
  text "PD4" at 24.979,73.273 h2
  text "PD3" at 33.694,73.277 h2
  text "PE13" at 84.396,73.233 h2
  text "PE14" at 75.104,73.093 h2
  text "PD6" at 24.998,70.733 h2
  text "PD5" at 33.694,70.737 h2
  text "PE11" at 84.396,70.693 h2
  text "PE12" at 75.148,70.553 h2
  text "PB3" at 25.148,68.193 h2
  text "PD7" at 33.694,68.197 h2
  text "PE9" at 84.396,68.153 h2
  text "PE10" at 75.113,68.013 h2
  text "PB5" at 25.144,65.653 h2
  text "PB4" at 33.694,65.657 h2
  text "PE7" at 84.396,65.613 h2
  text "PE8" at 75.955,65.473 h2
  text "PB7" at 25.331,63.276 h2
  text "PB6" at 33.694,63.117 h2
  text "GND" at 84.396,63.073 h2
  text "PB2" at 75.889,62.933 h2
  text "GND" at 13.022,62 h2 r270
  text "BOOT0" at 33.424,60.577 h2
  text "PB1" at 84.396,60.533 h2
  text "PB0" at 75.854,60.393 h2
  text "VDD" at 24.635,60.306 h2
  text "PB9" at 25.133,58.033 h2
  text "PB8" at 33.694,58.037 h2
  text "PC5" at 84.396,57.993 h2
  text "PC4" at 75.861,57.853 h2
  text "L" at 12.75,55.5 h2 r270
  text "PE1" at 25.227,55.493 h2
  text "PE0" at 33.694,55.497 h2
  text "PA7" at 84.396,55.453 h2
  text "PA6" at 75.806,55.313 h2
  text "CAN" at 14.272,54.5 h2 r270
  text "PE3" at 25.238,52.953 h2
  text "PE2" at 33.694,52.957 h2
  text "PA5" at 84.396,52.913 h2
  text "PA4" at 75.787,52.773 h2
  text "H" at 12.75,50.5 h2 r270
  text "PE5" at 25.235,50.413 h2
  text "PE4" at 33.694,50.417 h2
  text "PA3" at 84.396,50.373 h2
  text "PA2" at 75.831,50.233 h2
  text "PC13" at 24.333,47.873 h2
  text "PE6" at 33.694,47.877 h2
  text "PA1" at 84.396,47.833 h2
  text "PA0" at 75.796,47.693 h2
  text "PC15" at 24.329,45.333 h2
  text "PC14" at 33.694,45.337 h2
  text "PC3" at 84.396,45.293 h2
  text "PC2" at 75.905,45.153 h2
  text "PH1" at 25.007,42.793 h2
  text "PH0" at 33.694,42.797 h2
  text "PC1" at 84.396,42.753 h2
  text "PC0" at 75.87,42.613 h2
  text "3V" at 25.831,40.253 h2
  text "3V" at 33.694,40.257 h2
  text "GND" at 84.396,40.213 h2
  text "NRST" at 74.878,40.073 h2
  text "UART2 SELECT" at 62.75,39.013 h1.2
  text "USB" at 63.75,37.763 h1.2
  text "PMOD" at 66.5,37.763 h1.2
  text "VDD" at 75.356,37.76 h2
  text "5V" at 25.829,37.713 h2
  text "5V" at 33.694,37.717 h2
  text "VDD" at 84.396,37.673 h2
  text "5Vext" at 13.272,36.75 h2 r270
  text "GND" at 24.527,35.173 h2
  text "GND" at 33.694,35.177 h2
  text "GND" at 84.396,35.133 h2
  text "GND" at 75.276,34.993 h2
  text "GND" at 13.022,30.5 h2 r270
  text "GND" at 62.271,29.258 h1.2
  text "5V" at 65.25,29.263 h1.2
  text "PA3-UART2-RX" at 61.222,29.245 h1.2 r90
  text "PA2-UART2-TX" at 58.722,28.995 h1.2 r90
  text "LCD" at 169.677,14.63 h2.5
  text "KS0108" at 169.755,12.278 h2.5
  text "5V" at 118.25,9.263 h1.2
  text "GND" at 120.25,9.263 h1.2
  text "V0" at 123.501,9.263 h1.2
  text "D0" at 126,9.263 h1.2
  text "D3" at 133.75,9.263 h1.2
  text "D5" at 138.75,9.263 h1.2
  text "D6" at 141.25,9.263 h1.2
  text "D1" at 128.5,9.25 h1.2
  text "D2" at 131,9.25 h1.2
  text "D4" at 136.25,9.25 h1.2
  text "D7" at 143.75,9.25 h1.2
  text "LED-A" at 163.25,9.25 h1.2
  text "LCD12864" at 185.052,9.18 h2.5
  text "A0-CS1" at 147.237,9 h1.2 r90
  text "A1-CS2" at 149.737,9 h1.2 r90
  text "RST" at 152.237,9 h1.2 r90
  text "A2/WR" at 154.737,9 h1.2 r90
  text "A3-DI" at 157.237,9 h1.2 r90
  text "CS0" at 159.987,9 h1.2 r90
  text "VEE" at 162.5,9.001 h1.2 r90
  text "GND" at 167.487,9 h1.2 r90
  text "STM32F4-Disc1" at 88.203,8.033 h4 r90
  text "GND" at 117.5,2.763 h1.2
  text "A0-CS1" at 127.25,2.763 h1.2
  text "D6" at 136,2.763 h1.2
  text "D5" at 138.75,2.763 h1.2
  text "D3" at 143.75,2.763 h1.2
  text "D0" at 151.25,2.763 h1.2
  text "CS0" at 153.5,2.763 h1.2
  text "A3-DI" at 158.25,2.763 h1.2
  text "5V" at 164,2.763 h1.2
  text "GND" at 166.25,2.763 h1.2
  text "VEE" at 122.751,2.75 h1.2
  text "D7" at 133.5,2.75 h1.2
  text "D4" at 141.25,2.75 h1.2
  text "D2" at 146.25,2.75 h1.2
  text "D1" at 149,2.75 h1.2
  text "RST" at 125.5,1.263 h1.2
  text "A1-CS2" at 129.75,1.263 h1.2
  text "A2/WR" at 155.25,1.263 h1.2
  text "V0" at 161.251,1.263 h1.2
  text "LED-A" at 119.75,1.25 h1.2
Bottom Overlay:
  drawing of 22 lines, arcs and shapes, not listed
  text ".NomDeProjet" at 45.75,107.568 h2.2
  text ".Revision" at 17,107.525 h2.5
  text ".NomDeLetudiant" at 33.25,105.568 h2.2
  text "3V3" at 58.764,105.5 h1.3 r270
  text "GND" at 61.264,105.5 h1.3 r270
  text "PD14" at 63.75,105.5 h1.3 r270
  text "PD15" at 66.264,105.5 h1.3 r270
  text "PD12" at 68.75,105.5 h1.3 r270
  text "PD13" at 71.264,105.5 h1.3 r270
  text ".Print_Date" at 43.002,105.463 h2
  text "GND" at 28.25,101.267 h1.5
  text "TX6" at 35,101.267 h1.5
  text "AN-PC5" at 168.099,97.381 h1.78
  text "AN-PC1" at 127.94,97.131 h1.78
  text "PB1-PWM" at 182.112,97.128 h1.78
  text "PA1-PWM" at 141.77,97.075 h1.78
  text "GND" at 27.385,96.215 h2
  text "GND" at 78.385,96.215 h2
  text "GND" at 86.911,96.215 h2
  text "GND" at 36.135,96.178 h2
  text "RST-PE4" at 168.845,94.881 h1.78
  text "RST-PE2" at 128.908,94.631 h1.78
  text "PD2-INT" at 182.112,94.628 h1.78
  text "PE7-INT" at 141.77,94.575 h1.78
  text "PC7" at 27.385,93.675 h2
  text "NC" at 78.385,93.675 h2
  text "PD15" at 87.243,93.675 h2
  text "PC6" at 35.532,93.638 h2
  text "3V3" at 98.764,93.25 h1.3 r270
  text "GND" at 101.264,93.25 h1.3 r270
  text "PB0" at 103.764,93.25 h1.3 r270
  text "PA3-RX" at 106.264,93.25 h1.3 r270
  text "PA2-TX" at 108.75,93.25 h1.3 r270
  text "PC4" at 111.264,93.25 h1.3 r270
  text "CS-PE5" at 167.931,92.381 h1.78
  text "CS-PB12" at 128.867,92.131 h1.78
  text "PB11-RX" at 182.112,92.128 h1.78
  text "PB11-RX" at 141.77,92.075 h1.78
  text "PD13" at 87.239,91.265 h2
  text "PC9" at 27.385,91.135 h2
  text "PD14" at 78.385,91.135 h2
  text "PC8" at 35.53,91.098 h2
  text "SCK-PB13" at 169.877,89.881 h1.78
  text "SCK-PB13" at 129.946,89.631 h1.78
  text "PD8-TX" at 181.862,89.628 h1.78
  text "PD8-TX" at 141.77,89.575 h1.78
  text "3V3" at 16.545,89.514 h1.3
  text "3V3" at 3,89.264 h1.3
  text "PD11" at 87.25,88.665 h2
  text "PA9" at 27.385,88.595 h2
  text "PD12" at 78.385,88.595 h2
  text "PA8" at 35.604,88.558 h2
  text "MISO-PC2" at 169.817,87.381 h1.78
  text "MISO-PC2" at 129.887,87.131 h1.78
  text "PA8-SCL" at 181.862,87.128 h1.78
  text "PB6-SCL" at 141.77,87.075 h1.78
  text "GND" at 17,87.014 h1.3
  text "GND" at 3,86.764 h1.3
  text "PA13" at 27.385,86.055 h2
  text "PD10" at 78.385,86.055 h2
  text "PD9" at 86.422,86.055 h2
  text "PA10" at 36.446,86.018 h2
  text "MOSI-PB15" at 170.635,84.881 h1.78
  text "MOSI-PB15" at 130.705,84.631 h1.78
  text "PC9-SDA" at 181.862,84.628 h1.78
  text "PB9-SDA" at 141.77,84.575 h1.78
  text "PA5" at 16.631,84.514 h1.3
  text "PA15" at 3.25,84.264 h1.3
  text "PA15" at 27.385,83.515 h2
  text "PD8" at 78.385,83.515 h2
  text "PB15" at 87.126,83.515 h2
  text "PA14" at 36.456,83.478 h2
  text "+3.3V" at 166.43,82.388 h1.78
  text "+3.3V" at 126.5,82.138 h1.78
  text "+5V" at 181.862,82.128 h1.78
  text "+5V" at 141.77,82.075 h1.78
  text "PA6" at 16.626,82.014 h1.3
  text "PC11" at 3.25,81.764 h1.3
  text "PB13" at 87.122,81.065 h2
  text "PC11" at 27.385,80.975 h2
  text "PB14" at 78.385,80.975 h2
  text "PC10" at 36.372,80.938 h2
  text "GND" at 165.693,79.881 h1.78
  text "2" at 135.27,79.7 h8.8
  text "1" at 173.315,79.7 h8.8
  text "GND" at 125.763,79.631 h1.78
  text "GND" at 181.862,79.628 h1.78
  text "GND" at 141.77,79.575 h1.78
  text "PA7" at 16.626,79.5 h1.3
  text "PB7" at 3,79.25 h1.3
  text "3V3" at 98.764,78.69 h1.3 r270
  text "PA8" at 106.514,78.602 h1.3 r270
  text "PC9" at 103.764,78.538 h1.3 r270
  text "PC8" at 109.014,78.538 h1.3 r270
  text "PB11" at 87.133,78.465 h2
  text "PD0" at 27.385,78.435 h2
  text "PB12" at 78.385,78.435 h2
  text "PC12" at 36.337,78.398 h2
  text "GND" at 101.264,78.198 h1.3 r270
  text "PB14" at 111.5,77.96 h1.3 r270
  text "PE0" at 16.624,77.014 h1.3
  text "PB5" at 3,76.764 h1.3
  text "PD2" at 27.385,75.895 h2
  text "PB10" at 78.385,75.895 h2
  text "PE15" at 87.035,75.895 h2
  text "PD1" at 35.643,75.858 h2
  text "PD4" at 27.385,73.355 h2
  text "PE14" at 78.385,73.355 h2
  text "PE13" at 87.032,73.355 h2
  text "PD3" at 35.632,73.318 h2
  text "PD6" at 27.385,70.815 h2
  text "PE12" at 78.385,70.815 h2
  text "PE11" at 87.043,70.815 h2
  text "PD5" at 35.635,70.778 h2
  text "PB3" at 27.385,68.275 h2
  text "PE10" at 78.385,68.275 h2
  text "PE9" at 86.215,68.275 h2
  text "PD7" at 35.656,68.238 h2
  text "PB5" at 27.385,65.735 h2
  text "PE8" at 78.385,65.735 h2
  text "PE7" at 86.224,65.735 h2
  text "PB4" at 35.567,65.698 h2
  text "PB7" at 27.385,63.195 h2
  text "PB2" at 78.385,63.195 h2
  text "GND" at 86.911,63.195 h2
  text "PB6" at 35.548,63.158 h2
  text "VDD" at 27.385,60.655 h2
  text "PB0" at 78.385,60.655 h2
  text "PB1" at 86.302,60.655 h2
  text "BOOT0" at 37.68,60.618 h2
  text "GND" at 5.734,59.278 h2.5
  text "PB9" at 27.385,58.115 h2
  text "PC4" at 78.385,58.115 h2
  text "PC5" at 86.278,58.115 h2
  text "PB8" at 35.547,58.078 h2
  text "PE1" at 27.385,55.575 h2
  text "PA6" at 78.385,55.575 h2
  text "PA7" at 86.372,55.575 h2
  text "PE0" at 35.467,55.538 h2
  text "CAN_L" at 5.938,54.567 h1.8
  text "PE3" at 27.385,53.035 h2
  text "PA4" at 78.385,53.035 h2
  text "PA5" at 86.352,53.035 h2
  text "PE2" at 35.432,52.998 h2
  text "PE5" at 27.385,50.495 h2
  text "PA2" at 78.385,50.495 h2
  text "PA3" at 86.348,50.495 h2
  text "PE4" at 35.476,50.458 h2
  text "CAN_H" at 5.997,49.599 h1.8
  text "PC13" at 27.385,47.955 h2
  text "PA0" at 78.385,47.955 h2
  text "PA1" at 86.359,47.955 h2
  text "PE6" at 35.458,47.918 h2
  text "PC15" at 27.385,45.415 h2
  text "PC2" at 78.385,45.415 h2
  text "PC3" at 86.274,45.415 h2
  text "PC14" at 36.382,45.378 h2
  text "GND" at 15.087,45.267 h1.5
  text "3V3" at 22.019,43.517 h1.5
  text "PH1" at 27.385,42.875 h2
  text "PC0" at 78.385,42.875 h2
  text "PC1" at 86.285,42.875 h2
  text "PH0" at 35.687,42.838 h2
  text "Vext5V" at 10.059,41.017 h1.5
  text "VBUS" at 20.825,41.017 h1.5
  text "3V" at 27.385,40.335 h2
  text "NRST" at 78.385,40.335 h2
  text "GND" at 86.911,40.335 h2
  text "3V" at 34.832,40.298 h2
  text "5V" at 14.324,39.517 h1.5
  text "5V" at 27.385,37.795 h2
  text "VDD" at 78.385,37.795 h2
  text "VDD" at 86.804,37.795 h2
  text "5V" at 34.834,37.758 h2
  text "GND" at 27.385,35.255 h2
  text "GND" at 78.385,35.255 h2
  text "GND" at 86.911,35.255 h2
  text "GND" at 36.135,35.218 h2
  text "5Vext" at 10.009,35.059 h2
  text "GND" at 9.629,30.314 h2
  text "GND" at 64.5,29.263 h1.2
  text "5V" at 66.5,29.263 h1.2
  text "PA2-UART2-TX" at 58.013,29.25 h1.2 r270
  text "PA3-UART2-RX" at 60.513,29.25 h1.2 r270
  text "5V" at 119.5,9.263 h1.2
  text "GND" at 122.5,9.263 h1.2
  text "V0" at 124.749,9.263 h1.2
  text "D0" at 127.25,9.263 h1.2
  text "D3" at 135,9.263 h1.2
  text "D5" at 140,9.263 h1.2
  text "D6" at 142.5,9.263 h1.2
  text "D1" at 129.75,9.25 h1.2
  text "D2" at 132.25,9.25 h1.2
  text "D4" at 137.5,9.25 h1.2
  text "D7" at 145,9.25 h1.2
  text "A0-CS1" at 146.513,9.25 h1.2 r270
  text "A1-CS2" at 149.013,9.25 h1.2 r270
  text "RST" at 151.513,9.25 h1.2 r270
  text "A2/WR" at 154.013,9.25 h1.2 r270
  text "A3-DI" at 156.513,9.25 h1.2 r270
  text "CS0" at 159.263,9.25 h1.2 r270
  text "VEE" at 161.75,9.251 h1.2 r270
  text "LED-A" at 164.25,9.25 h1.2 r270
  text "GND" at 166.763,9.25 h1.2 r270
  text "GND" at 120,2.763 h1.2
  text "D6" at 137.25,2.763 h1.2
  text "D5" at 139.75,2.763 h1.2
  text "D3" at 145,2.763 h1.2
  text "D0" at 152.5,2.763 h1.2
  text "CS0" at 155.5,2.763 h1.2
  text "A3-DI" at 161,2.763 h1.2
  text "V0" at 162.749,2.763 h1.2
  text "5V" at 165.25,2.763 h1.2
  text "GND" at 168.5,2.763 h1.2
  text "D7" at 134.75,2.75 h1.2
  text "D4" at 142.25,2.75 h1.2
  text "D2" at 147.5,2.75 h1.2
  text "D1" at 150,2.75 h1.2
  text "VEE" at 123.75,1.751 h1.2 r270
  text "RST" at 126.263,1.75 h1.2 r270
  text "LED-A" at 121.25,0.75 h1.2 r270
  text "A0-CS1" at 128.731,0.575 h1.1 r270
  text "A2/WR" at 156.76,0.552 h1.2 r270
  text "A1-CS2" at 131.392,0.544 h1.1 r270
3D:
  lines w0.254: 53.26,-10.16 71.04,-10.16 71.04,30.48 53.26,30.48 53.26,-10.16
Board:
  the board outline again, w0.5
Drill Drawing:
  drawing of 306 lines, arcs and shapes, not listed
  text "Layer" at 243.258,99.25 h1.5
  text "Name" at 249.534,99.25 h1.5
  text "Thickness" at 265.542,99.25 h1.5
  text "Gerber" at 274.5,99.25 h1.5
  text "Board Layer Stack" at 281.622,99.25 h1.5
  text "Top Overlay" at 249.534,96.25 h1.5
  text "GTO" at 274.5,96.25 h1.5
  text "Top Solder" at 249.534,93.25 h1.5
  text "0.025mm" at 265.542,93.25 h1.5
  text "GTS" at 274.5,93.25 h1.5
  text "Top Surface Finish" at 249.534,90.25 h1.5
  text "0.020mm" at 265.542,90.25 h1.5
  text "1" at 243.258,87.25 h1.5
  text "Top Layer" at 249.534,87.25 h1.5
  text "0.035mm" at 265.542,87.25 h1.5
  text "GTL" at 274.5,87.25 h1.5
  text "Dielectric 1" at 249.534,84.25 h1.5
  text "1.499mm" at 265.542,84.25 h1.5
  text "2" at 243.256,81.25 h1.5
  text "Bottom Layer" at 249.534,81.25 h1.5
  text "0.035mm" at 265.542,81.25 h1.5
  text "GBL" at 274.5,81.25 h1.5
  text "Bottom Surface Finish" at 249.534,78.25 h1.5
  text "0.020mm" at 265.542,78.25 h1.5
  text "Bottom Solder" at 249.534,75.25 h1.5
  text "0.025mm" at 265.542,75.25 h1.5
  text "GBS" at 274.5,75.25 h1.5
  text "Bottom Overlay" at 249.534,72.25 h1.5
  text "GBO" at 274.5,72.25 h1.5
  text "Total board thickness:" at 243.258,69.25 h1.5
  text "1.659mm" at 265.542,69.25 h1.5
  text "Symbol" at 241.992,54.121 h1.8
  text "Count" at 249.043,54.121 h1.8
  text "Hole Size" at 256.349,54.121 h1.8
  text "Plated" at 270.801,54.121 h1.8
  text "Hole Type" at 276.99,54.121 h1.8
  text "Drill Layer Pair" at 286.001,54.121 h1.8
  text "Via/Pad" at 303.063,54.121 h1.8
  text "Pad Shape" at 310.447,54.121 h1.8
  text "Hole Length" at 324.007,54.121 h1.8
  text "539" at 249.043,51.018 h1.5
  text "0.300mm (11.81mil)" at 256.349,51.018 h1.5
  text "PTH" at 270.801,51.018 h1.5
  text "Round" at 276.99,51.018 h1.5
  text "Top Layer - Bottom Layer" at 286.001,51.018 h1.5
  text "Via" at 303.063,51.018 h1.5
  text "Rounded" at 310.447,51.018 h1.5
  text "-" at 324.007,51.018 h1.5
  text "16" at 249.043,47.915 h1.5
  text "0.400mm (15.75mil)" at 256.349,47.915 h1.5
  text "PTH" at 270.801,47.915 h1.5
  text "Round" at 276.99,47.915 h1.5
  text "Top Layer - Bottom Layer" at 286.001,47.915 h1.5
  text "Pad" at 303.063,47.915 h1.5
  text "Rounded" at 310.447,47.915 h1.5
  text "-" at 324.007,47.915 h1.5
  text "92" at 249.043,44.812 h1.5
  text "0.500mm (19.69mil)" at 256.349,44.812 h1.5
  text "PTH" at 270.801,44.812 h1.5
  text "Round" at 276.99,44.812 h1.5
  text "Top Layer - Bottom Layer" at 286.001,44.812 h1.5
  text "Via" at 303.063,44.812 h1.5
  text "Rounded" at 310.447,44.812 h1.5
  text "-" at 324.007,44.812 h1.5
  text "2" at 249.043,41.709 h1.5
  text "0.520mm (20.47mil)" at 256.349,41.709 h1.5
  text "PTH" at 270.801,41.709 h1.5
  text "Round" at 276.99,41.709 h1.5
  text "Top Layer - Bottom Layer" at 286.001,41.709 h1.5
  text "Via" at 303.063,41.709 h1.5
  text "Rounded" at 310.447,41.709 h1.5
  text "-" at 324.007,41.709 h1.5
  text "11" at 249.043,38.606 h1.5
  text "0.610mm (24.02mil)" at 256.349,38.606 h1.5
  text "PTH" at 270.801,38.606 h1.5
  text "Round" at 276.99,38.606 h1.5
  text "Top Layer - Bottom Layer" at 286.001,38.606 h1.5
  text "Pad" at 303.063,38.606 h1.5
  text "Rounded" at 310.447,38.606 h1.5
  text "-" at 324.007,38.606 h1.5
  text "3" at 249.043,35.503 h1.5
  text "0.700mm (27.56mil)" at 256.349,35.503 h1.5
  text "PTH" at 270.801,35.503 h1.5
  text "Round" at 276.99,35.503 h1.5
  text "Top Layer - Bottom Layer" at 286.001,35.503 h1.5
  text "Pad" at 303.063,35.503 h1.5
  text "(Mixed)" at 310.447,35.503 h1.5
  text "-" at 324.007,35.503 h1.5
  text "3" at 249.043,32.4 h1.5
  text "0.800mm (31.50mil)" at 256.349,32.4 h1.5
  text "PTH" at 270.801,32.4 h1.5
  text "Slot" at 276.99,32.4 h1.5
  text "Top Layer - Bottom Layer" at 286.001,32.4 h1.5
  text "Pad" at 303.063,32.4 h1.5
  text "Rounded Rectangle" at 310.447,32.4 h1.5
  text "3.000mm (118.11mil)" at 324.007,32.4 h1.5
  text "214" at 249.043,29.297 h1.5
  text "1.000mm (39.37mil)" at 256.349,29.297 h1.5
  text "PTH" at 270.801,29.297 h1.5
  text "Round" at 276.99,29.297 h1.5
  text "Top Layer - Bottom Layer" at 286.001,29.297 h1.5
  text "Pad" at 303.063,29.297 h1.5
  text "(Mixed)" at 310.447,29.297 h1.5
  text "-" at 324.007,29.297 h1.5
  text "5" at 249.043,26.194 h1.5
  text "1.300mm (51.18mil)" at 256.349,26.194 h1.5
  text "PTH" at 270.801,26.194 h1.5
  text "Round" at 276.99,26.194 h1.5
  text "Top Layer - Bottom Layer" at 286.001,26.194 h1.5
  text "Pad" at 303.063,26.194 h1.5
  text "Rounded" at 310.447,26.194 h1.5
  text "-" at 324.007,26.194 h1.5
  text "2" at 249.043,23.091 h1.5
  text "1.400mm (55.12mil)" at 256.349,23.091 h1.5
  text "PTH" at 270.801,23.091 h1.5
  text "Slot" at 276.99,23.091 h1.5
  text "Top Layer - Bottom Layer" at 286.001,23.091 h1.5
  text "Pad" at 303.063,23.091 h1.5
  text "Rounded Rectangle" at 310.447,23.091 h1.5
  text "0.600mm (23.62mil)" at 324.007,23.091 h1.5
  text "2" at 249.043,19.988 h1.5
  text "2.100mm (82.68mil)" at 256.349,19.988 h1.5
  text "PTH" at 270.801,19.988 h1.5
  text "Slot" at 276.99,19.988 h1.5
  text "Top Layer - Bottom Layer" at 286.001,19.988 h1.5
  text "Pad" at 303.063,19.988 h1.5
  text "Rounded Rectangle" at 310.447,19.988 h1.5
  text "0.600mm (23.62mil)" at 324.007,19.988 h1.5
  text "6" at 249.043,16.885 h1.5
  text "2.850mm (112.21mil)" at 256.349,16.885 h1.5
  text "PTH" at 270.801,16.885 h1.5
  text "Round" at 276.99,16.885 h1.5
  text "Top Layer - Bottom Layer" at 286.001,16.885 h1.5
  text "Pad" at 303.063,16.885 h1.5
  text "Rounded" at 310.447,16.885 h1.5
  text "-" at 324.007,16.885 h1.5
  text "1" at 249.043,13.782 h1.5
  text "2.850mm (112.21mil)" at 256.349,13.782 h1.5
  text "PTH" at 270.801,13.782 h1.5
  text "Slot" at 276.99,13.782 h1.5
  text "Top Layer - Bottom Layer" at 286.001,13.782 h1.5
  text "Pad" at 303.063,13.782 h1.5
  text "Rounded" at 310.447,13.782 h1.5
  text "5.403mm (212.72mil)" at 324.007,13.782 h1.5
  text "5" at 249.043,10.678 h1.5
  text "3.700mm (145.67mil)" at 256.349,10.678 h1.5
  text "PTH" at 270.801,10.678 h1.5
  text "Round" at 276.99,10.678 h1.5
  text "Top Layer - Bottom Layer" at 286.001,10.678 h1.5
  text "Pad" at 303.063,10.678 h1.5
  text "Rounded" at 310.447,10.678 h1.5
  text "-" at 324.007,10.678 h1.5
  text "901 Total" at 249.043,7.575 h1.5
  text "Slot definitions :" at 241.992,5.403 h1.5
  text "Routed Path Length" at 252.218,5.403 h1.5
  text "= Calculated from tool start centre position to tool end centre position." at 264.885,5.403 h1.5
  text "Hole Length" at 252.218,4.162 h1.5
  text "= Routed Path Length + Tool Size = Slot length as defined in the PCB layout" at 260.183,4.162 h1.5

## Dimensions
2.5,110 to 2.5,0 on Drill Drawing
0,107.5 to 200,107.5 on Drill Drawing